# Altium PCB Interface.PcbDoc
Units mil, origin at the board's own origin, x right, y up, seen from the top; angles counter-clockwise.
Board outline 3937.01 x 6100 mil, 2 copper layers (Top Layer, Bottom Layer); 108 components, 96 nets, 344 pads, 0 vias.
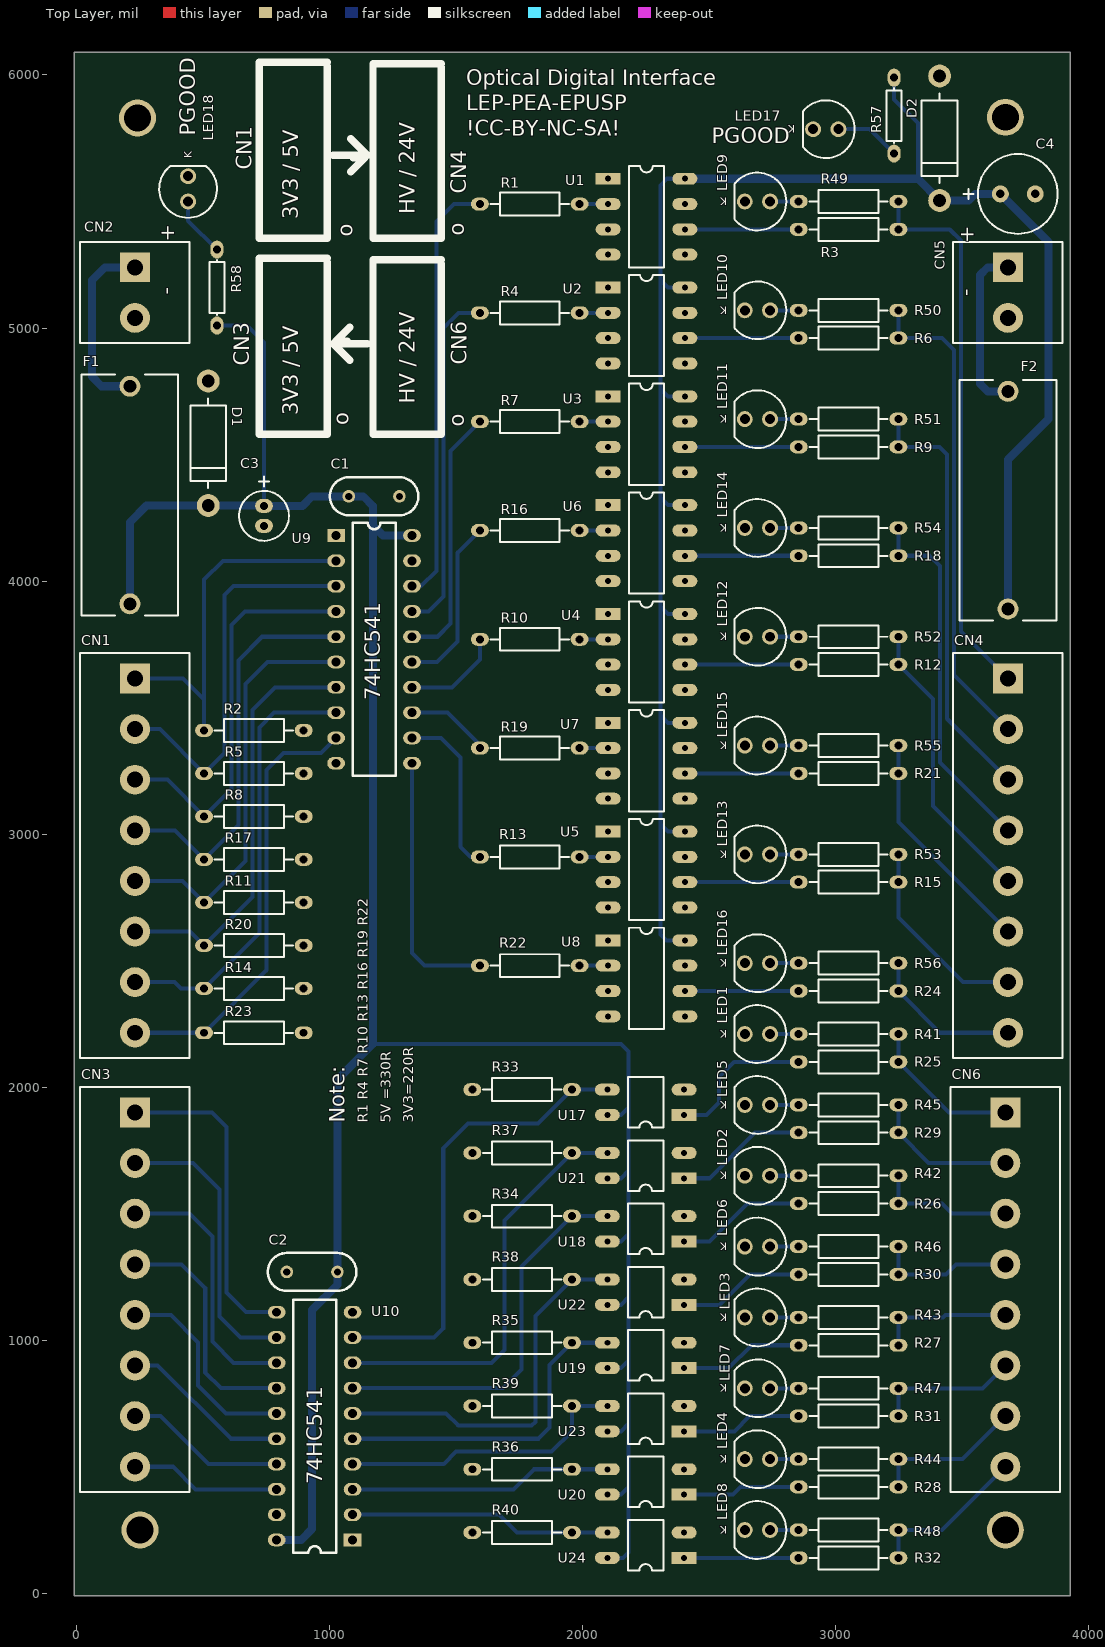
[diagram p0: Top Layer view]
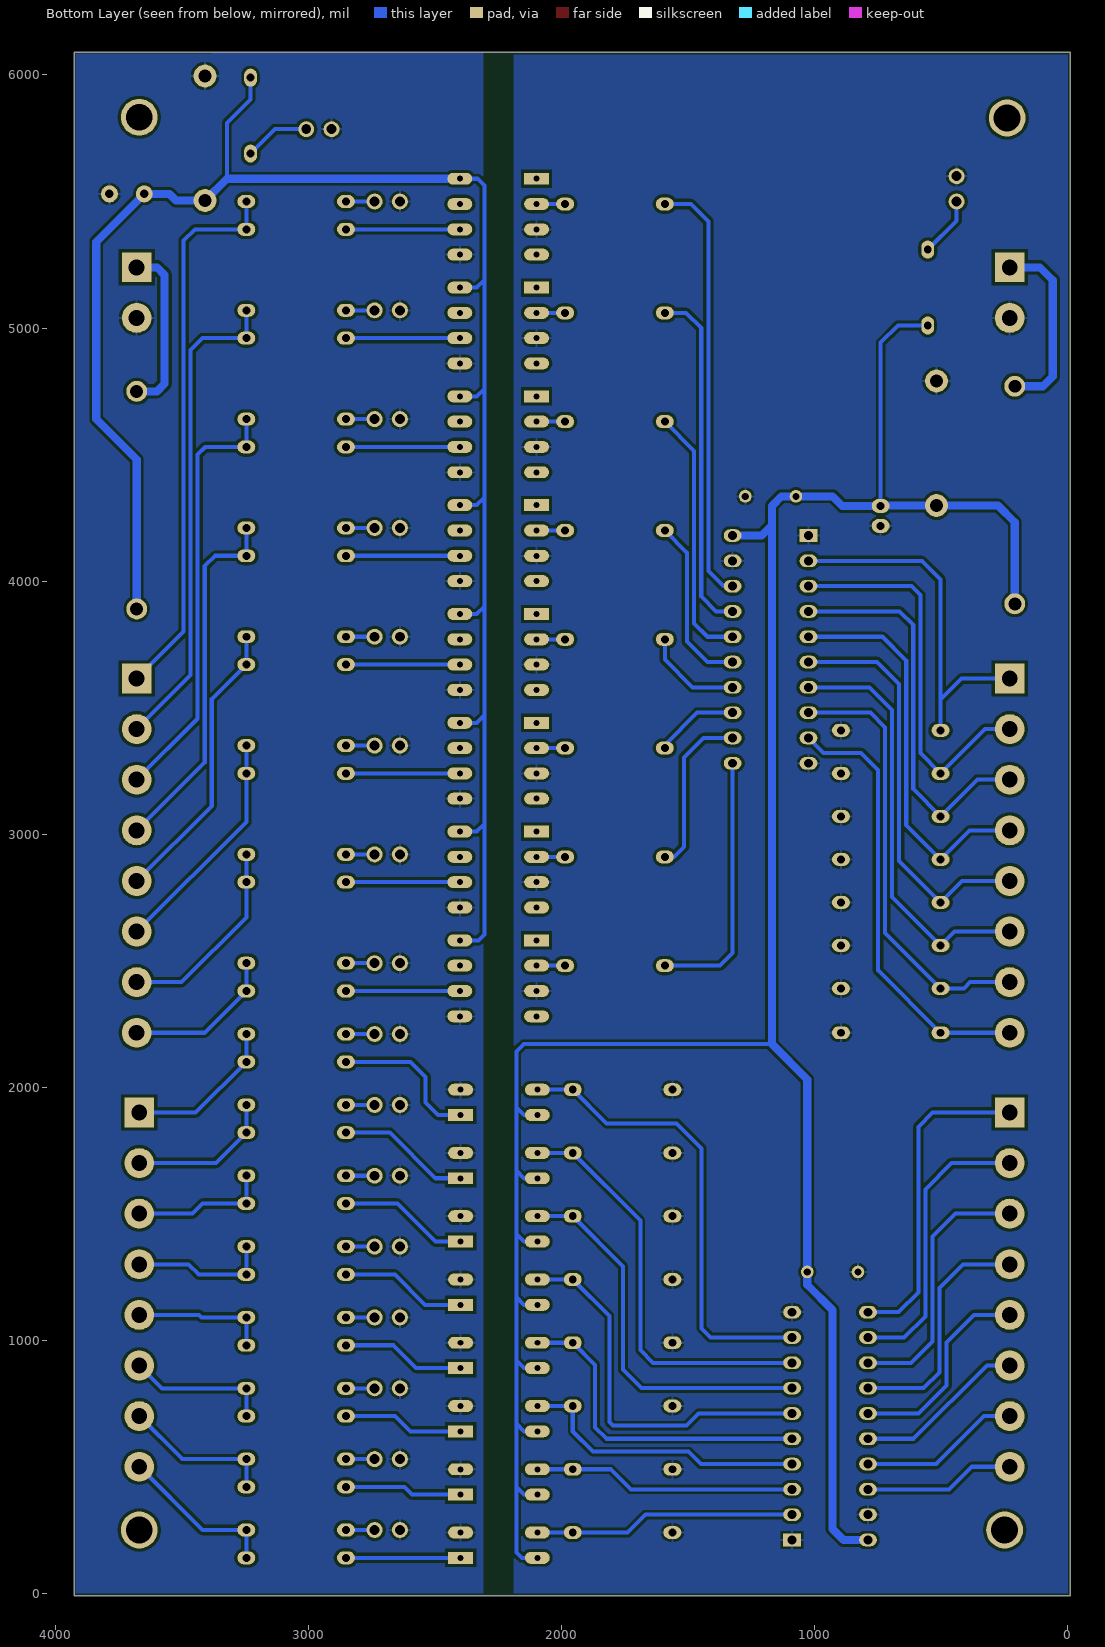
[diagram p1: Bottom Layer view, seen from below]

## Layer stack, top to bottom
Top Solder: solder mask 0.4, Solder Resist, Dk 3.5
Top Layer: signal copper 1.4
Dielectric 1: dielectric 12.6, FR-4, Dk 4.8
Bottom Layer: signal copper 1.4
Bottom Solder: solder mask 0.4, Solder Resist, Dk 3.5

## Board outline
-10,-10 3927.01,-10 3927.01,6090 -10,6090

## Design rules (kind name [scope] priority, off if disabled: settings)
Clearance [All] p1: gap=11.81
PolygonConnect [All] p1: connectstyle=Relief reliefconductorwidth=10 reliefentries=4 polygonreliefangle="90 Angle" airgapwidth=10
RoutingVias [All] p1: holewidth=28 width=50 viastyle="Through Hole" minholewidth=28 minwidth=50 maxholewidth=28 maxwidth=50
SolderMaskExpansion [All] p1: expansion=4
Width [All] p1: maxlimit=40 minlimit=10 preferedwidth=16 toplayer_maxwidth=10 toplayer_prefwidth=10 bottomlayer_minwidth=16 minimp=50.000000 maximp=50.000000 favimp=50.000000
30 further rules are at their usual default settings.

## Classes and differential pairs
component class U_Power: C1 C2 C3 C4 CN2 CN3 CN4 CN5 CN6 D1 D2 F1 F2 LED17 LED18 R57 R58
component class U_Interface_DigitalToCLP: LED9 LED10 LED11 LED12 LED13 LED14 LED15 LED16 R1 R2 R3 R4 R5 R6 R7 R8 R9 R10 R11 R12 R13 R14 R15 R16 R17 R18 R19 R20 R21 R22 R23 R24 R49 R50 R51 R52 R53 R54 R55 R56 U1 U2 U3 U4 U5 U6 U7 U8 U9
component class U_Interface_CLPToDigital: LED1 LED2 LED3 LED4 LED5 LED6 LED7 LED8 R25 R26 R27 R28 R29 R30 R31 R32 R33 R34 R35 R36 R37 R38 R39 R40 R41 R42 R43 R44 R45 R46 R47 R48 U10 U17 U18 U19 U20 U21 U22 U23 U24

## Components (designator, comment, footprint, x,y, rotation, side; value= is the part's Value field where it differs from the comment)
C1 "100nF" DiskCapacitor 1275,4335 r180 top
C2 "100nF" DiskCapacitor 830,1270 r0 top
C3 "100uF 16V" "ECA 5x11" 740,4297 r270 top
C4 "100uF 50V" "ECA 8x11.5" 3650,5530 r0 top
CN1 "EHK2V-08P" EHK2V-08P 230,3615 r0 top
CN2 "EHK2V-02P" EHK2V-02P 230,5240 r0 top
CN3 "EHK2V-08P" EHK2V-08P 230,1900 r0 top
CN4 "EHK2V-08P" EHK2V-08P 3680,3615 r0 top
CN5 "EHK2V-02P" EHK2V-02P 3680,5240 r0 top
CN6 "EHK2V-08P" EHK2V-08P 3670,1900 r0 top
D1 "1N5339BRLG" DO-15 519.6,4544.6 r270 top
D2 "1N5364BRLG" DO-15 3410,5750 r270 top
F1 "4527" 4527 210,4770 r270 top
F2 "4527" 4527 3680,3890 r90 top
LED1 "151053YS04500" "Type 5mm" 2690,2210 r180 top
LED2 "151053YS04500" "Type 5mm" 2690,1650 r180 top
LED3 "151053YS04500" "Type 5mm" 2690,1090 r180 top
LED4 "151053YS04500" "Type 5mm" 2690,530 r180 top
LED5 "151053YS04500" "Type 5mm" 2690,1930 r180 top
LED6 "151053YS04500" "Type 5mm" 2690,1370 r180 top
LED7 "151053YS04500" "Type 5mm" 2690,810 r180 top
LED8 "151053YS04500" "Type 5mm" 2690,250 r180 top
LED9 "151053YS04500" "Type 5mm" 2690,5500 r180 top
LED10 "151053YS04500" "Type 5mm" 2690,5070 r180 top
LED11 "151053YS04500" "Type 5mm" 2690,4640 r180 top
LED12 "151053YS04500" "Type 5mm" 2690,3780 r180 top
LED13 "151053YS04500" "Type 5mm" 2690,2920 r180 top
LED14 "151053YS04500" "Type 5mm" 2690,4210 r180 top
LED15 "151053YS04500" "Type 5mm" 2690,3350 r180 top
LED16 "151053YS04500" "Type 5mm" 2690,2490 r180 top
LED17 "151053YS04500" "Type 5mm" 2960,5785.74 r180 top
LED18 "151053YS04500" "Type 5mm" 440,5550 r90 top
R1 "330R" CR25 1790,5490 r0 top
R2 "10K" CR25 700,3410 r180 top
R3 "10R" CR25 3050,5390 r0 top
R4 "330R" CR25 1790,5060 r0 top
R5 "10K" CR25 700,3240 r180 top
R6 "10R" CR25 3050,4960 r0 top
R7 "330R" CR25 1790,4630 r0 top
R8 "10K" CR25 700,3070 r180 top
R9 "10R" CR25 3050,4530 r0 top
R10 "330R" CR25 1790,3770 r0 top
R11 "10K" CR25 700,2730 r180 top
R12 "10R" CR25 3050,3670 r0 top
R13 "330R" CR25 1790,2910 r0 top
R14 "10K" CR25 700,2390 r180 top
R15 "10R" CR25 3050,2810 r0 top
R16 "330R" CR25 1790,4200 r0 top
R17 "10K" CR25 700,2900 r180 top
R18 "10R" CR25 3050,4100 r0 top
R19 "330R" CR25 1790,3340 r0 top
R20 "10K" CR25 700,2560 r180 top
R21 "10R" CR25 3050,3240 r0 top
R22 "330R" CR25 1790,2480 r0 top
R23 "10K" CR25 700,2215 r180 top
R24 "10R" CR25 3050,2380 r0 top
R25 "2K2" CR25 3050,2100 r0 top
R26 "2K2" CR25 3050,1540 r0 top
R27 "2K2" CR25 3050,980 r0 top
R28 "2K2" CR25 3050,420 r0 top
R29 "2K2" CR25 3050,1820 r0 top
R30 "2K2" CR25 3050,1260 r0 top
R31 "2K2" CR25 3050,700 r0 top
R32 "2K2" CR25 3050,140 r0 top
R33 "2K2" CR25 1760,1990 r0 top
R34 "2K2" CR25 1760,1490 r0 top
R35 "2K2" CR25 1760,990 r180 top
R36 "2K2" CR25 1760,490 r0 top
R37 "2K2" CR25 1760,1740 r0 top
R38 "2K2" CR25 1760,1240 r0 top
R39 "2K2" CR25 1760,740 r0 top
R40 "2K2" CR25 1760,240 r0 top
R41 "1" CR25 3050,2210 r0 top
R42 "Res1" CR25 3050,1650 r0 top
R43 "Res1" CR25 3050,1090 r0 top
R44 "Res1" CR25 3050,530 r0 top
R45 "Res1" CR25 3050,1930 r0 top
R46 "Res1" CR25 3050,1370 r0 top
R47 "Res1" CR25 3050,810 r0 top
R48 "Res1" CR25 3050,250 r0 top
R49 "Res1" CR25 3050,5500 r0 top
R50 "Res1" CR25 3050,5070 r0 top
R51 "Res1" CR25 3050,4640 r0 top
R52 "Res1" CR25 3050,3780 r0 top
R53 "Res1" CR25 3050,2920 r0 top
R54 "Res1" CR25 3050,4210 r0 top
R55 "Res1" CR25 3050,3350 r0 top
R56 "Res1" CR25 3050,2490 r0 top
R57 "Res1" AXIAL-0.3 3230,5839.6 r90 top
R58 "Res1" AXIAL-0.3 553.94,5160 r270 top
U1 "TLP251" DIP8 2100,5590 r0 top
U2 "TLP251" DIP8 2100,5160 r0 top
U3 "TLP251" DIP8 2100,4730 r0 top
U4 "TLP251" DIP8 2100,3870 r0 top
U5 "TLP251" DIP8 2100,3010 r0 top
U6 "TLP251" DIP8 2100,4300 r0 top
U7 "TLP251" DIP8 2100,3440 r0 top
U8 "TLP251" DIP8 2100,2580 r0 top
U9 "SN74HC541" PDIP20 1025,4180 r0 top
U10 "SN74HC541" PDIP20 1090,210.63 r180 top
U17 "TLP620" DIP4 2400,1890 r180 top
U18 "TLP620" DIP4 2400,1390 r180 top
U19 "TLP620" DIP4 2400,890 r180 top
U20 "TLP620" DIP4 2400,390 r180 top
U21 "TLP620" DIP4 2400,1640 r180 top
U22 "TLP620" DIP4 2400,1140 r180 top
U23 "TLP620" DIP4 2400,640 r180 top
U24 "TLP620" DIP4 2400,140 r180 top

## Footprints (in the part's own frame and the unit in brackets; to place one, negate y for a bottom-side part, rotate by r counter-clockwise, add the part's x,y. Pads: shape width x height; smd on the part's side, far side on the other; paste and mask are expansions set on the pad)
4527 [mm] "5mm PC FUSE HOLDER"
  round 2.1 hole 1.3: 1(0,0) 2(21.84,0)
  silkscreen extent -1.16,-4.85 23,4.85, body extent -1.26,-4.95 23.1,4.95, height 10
AXIAL-0.3 [mm] "Axial Device, Thru-Hole; 2 Leads; 0.3 in Pin Spacing"
  oval 1.8x1.3 hole 0.8: 1(-3.81,0) 2(3.81,0)
  silkscreen extent -2.77,-0.76 2.77,0.76
CR25 [mm] "Through Hole Carbon Film Resistor - 1/4W (0.25W)"
  oval 1.8x1.3 hole 0.8: 1(-5,0) 2(5,0)
  silkscreen extent -3.94,-1.15 3.94,1.15
DIP4 [mm]
  rect 2.5x1.2 hole 0.6: 1(0,0)
  oval 2.5x1.2 hole 0.6: 2(0,-2.54) 3(7.7,-2.54) 4(7.7,0)
  silkscreen extent 2.08,-3.81 5.61,1.27
DIP8 [mm]
  rect 2.5x1.2 hole 0.6: 1(0,0)
  oval 2.5x1.2 hole 0.6: 2(0,-2.54) 3(0,-5.08) 4(0,-7.62) 5(7.7,-7.62) 6(7.7,-5.08) 7(7.7,-2.54) 8(7.7,0)
  silkscreen extent 2.08,-8.89 5.62,1.27
DiskCapacitor [mil]
  round 50 hole 28: 1(0,0) 2(200,0)
  silkscreen extent -75,-75 275,75, body extent -60,-20 260,20, height 380
DO-15 [mm] "DO-15"
  round 2.3 hole 1.3: 1(6.25,0) 2(-6.25,0)
  silkscreen extent -4.5,-1.8 4.5,1.8, body extent -3.8,-1.8 3.8,1.8, height 3.6
"ECA 5x11" [mm]
  oval 1.4x1.8 hole 0.8: 1(0,0) 2(2,0)
  silkscreen extent -2.98,-2.5 3.5,2.5, body extent -1.51,-2.51 3.51,2.51, height 11
"ECA 8x11.5" [mm]
  round 1.7 hole 0.85: 1(0,0) 2(3.5,0)
  silkscreen extent -3.73,-4 5.75,4, body extent -2.26,-4.01 5.76,4.01, height 11.5
EHK2V-02P [mm] "PCB Terminal Blocks"
  rect 3x3 hole 1.6: 1(0,0)
  round 3 hole 1.6: 2(0,-5.08)
  silkscreen extent -5.5,-7.62 5.5,2.54, body extent -5.6,-7.72 5.6,2.64, height 18
EHK2V-08P [mm] "PCB Terminal Blocks"
  rect 3x3 hole 1.6: 1(0,0)
  round 3 hole 1.6: 2(0,-5.08) 3(0,-10.16) 4(0,-15.24) 5(0,-20.32) 6(0,-25.4) 7(0,-30.48) 8(0,-35.56)
  silkscreen extent -5.5,-38.1 5.5,2.54, body extent -5.6,-38.1 5.6,2.54, height 18
PDIP20 [mil]
  rect 70x50 hole 35: 1(0,0)
  oval 70x50 hole 35: 2(0,-100) 3(0,-200) 4(0,-300) 5(0,-400) 6(0,-500) 7(0,-600) 8(0,-700) 9(0,-800) 10(0,-900) 11(300,-900) 12(300,-800) 13(300,-700) 14(300,-600) 15(300,-500) 16(300,-400) 17(300,-300) 18(300,-200) 19(300,-100) 20(300,0)
  silkscreen extent 65,-950 235,50, body extent -10,-950 310,50, height 100
"Type 5mm" [mm] "THT, LED-5mm, 2pin- Body 5.8mm"
  round 1.6 hole 1: 1(1.27,0) 2(-1.27,0)
  silkscreen extent -2.9,-2.9 2.29,2.9, body extent -2.9,-2.9 2.5,2.9, height 11.7

## Part data
C1 C2: library part Capacitor, "Capacitor"
C3: library part ECA1CM101
C4: library part ECA1HM101
CN1 CN2 CN3 CN4 CN5 CN6: "PCB Terminal Blocks"
D1: library part "Diode Zener", "5V6 @ 5W"
D2: library part "Diode Zener", "33V @ 5W"
F1 F2: "5mm PC FUSE HOLDER"
LED1 LED2 LED3 LED4 LED5 LED6 LED7 LED8 LED9 LED10 LED11 LED12 LED13 LED14 LED15 LED16 LED17 LED18: library part CMP-1477-00001-1, "THT LED round mono-color waterclear, WL-TMRW, Yellow"
R1 R2 R3 R4 R5 R6 R7 R8 R9 R10 R11 R12 R13 R14 R15 R16 R17 R18 R19 R20 R21 R22 R23 R24 R25 R26 R27 R28 R29 R30 R31 R32 R33 R34 R35 R36 R37 R38 R39 R40: library part Resistor, "Resistor"
R41: library part Res1, "Resistor"
R42 R43 R44 R45 R46 R47 R48 R49 R50 R51 R52 R53 R54 R55 R56 R57 R58: "Resistor"
U1 U2 U3 U4 U5 U6 U7 U8: "Photocoupler"
U9 U10: "Octal Buffers and Line Drivers With 3-State Outputs"
U17 U18 U19 U20 U21 U22 U23 U24: "TOSHIBA Photocoupler"

## Free pads (board coordinates)
  round 145.67 hole 106.3 unplated: FF1(240,5830) FF2(3670,5832.99) FF3(250,250) FF4(3670,250)

## Nets (pads, with @x,y where several pads share a name; then routed paths per layer and width w, separated by ;. In a path a pad name is that pad's centre, name@x,y a point inside that pad or via, vN(x,y) a via of type N, cw(c..) or ccw(c..) an arc to the next point about the centre after c; other vN are vias at no path point)
CLP_GND: C4.2 CN5.2 D2.2 LED1.1 LED2.1 LED3.1 LED4.1 LED5.1 LED6.1 LED7.1 LED8.1 LED9.1 LED10.1 LED11.1 LED12.1 LED13.1 LED14.1 LED15.1 LED16.1 LED17.1 U1.5 U2.5 U3.5 U4.5 U5.5 U6.5 U7.5 U8.5 U17.2 U18.2 U19.2 U20.2 U21.2 U22.2 U23.2 U24.2
GND: C1.1 C2.1 C3.2 CN2.2 D1.2 LED18.1 R2.1 R5.1 R8.1 R11.1 R14.1 R17.1 R20.1 R23.1 R33.1 R34.1 R35.2 R36.1 R37.1 R38.1 R39.1 R40.1 U1.3 U2.3 U3.3 U4.3 U5.3 U6.3 U7.3 U8.3 U9.1 U9.10 U9.19 U10.1 U10.10 U10.19
NetCN1_1: CN1.1 R2.2 U9.2 | length 1456.1
  Bottom Layer w16: CN1.1 419.73,3615 503.15,3531.58 ; R2.2 503.15,3531.58 ; U9.2 577.3,4080 503.15,4005.85 503.15,3531.58
NetCN1_2: CN1.2 R5.2 U9.3 | length 1539.6
  Bottom Layer w16: CN1.2 328.15,3415 R5.2 583.37,3320.22 583.37,3944.39 618.98,3980 U9.3
NetCN1_3: CN1.3 R8.2 U9.4 | length 1570.3
  Bottom Layer w16: CN1.3 358.15,3215 R8.2 611.18,3178.03 611.18,3826.3 664.88,3880 U9.4
NetCN1_4: CN1.4 R17.2 U9.5 | length 1588.5
  Bottom Layer w16: CN1.4 388.15,3015 R17.2 638.99,3035.84 638.99,3686.83 732.15,3780 U9.5
NetCN1_5: CN1.5 R11.2 U9.6 | length 1633.1
  Bottom Layer w16: CN1.5 418.15,2815 R11.2 666.8,2893.65 666.8,3592.54 754.26,3680 U9.6
NetCN1_6: CN1.6 R20.2 U9.7 | length 1673.6
  Bottom Layer w16: CN1.6 448.15,2615 R20.2 694.61,2751.46 694.61,3491.12 783.49,3580 U9.7
NetCN1_7: CN1.7 R14.2 U9.8 | length 1733
  Bottom Layer w16: CN1.7 386.22,2415 411.22,2390 R14.2 722.42,2609.27 722.42,3422.03 780.39,3480 U9.8
NetCN1_8: CN1.8 R23.2 U9.9 | length 1741.2
  Bottom Layer w16: CN1.8 R23.2 750.23,2462.08 750.23,3253.52 816.93,3320.22 965.22,3320.22 U9.9
NetCN2_1: CN2.1 F1.1 | length 737.6
  Bottom Layer w32: F1.1 98.22,4770 60,4808.22 60,5188.8 111.2,5240 CN2.1
NetCN3_1: CN3.1 U10.11 | length 1270.2
  Bottom Layer w16: CN3.1 534.28,1900 591.24,1843.04 591.24,1188.76 669.37,1110.63 U10.11
NetCN3_2: CN3.2 U10.12 | length 1139.4
  Bottom Layer w16: CN3.2 459.67,1700 563.43,1596.23 563.43,1094.52 647.32,1010.63 U10.12
NetCN3_3: CN3.3 U10.13 | length 1047.1
  Bottom Layer w16: CN3.3 445,1500 535.62,1409.38 535.62,994.62 619.61,910.63 U10.13
NetCN3_4: CN3.4 U10.14 | length 958
  Bottom Layer w16: CN3.4 414.1,1300 507.81,1206.29 507.81,872.82 570,810.63 U10.14
NetCN3_5: CN3.5 U10.15 | length 821.5
  Bottom Layer w16: CN3.5 371.66,1100 480,991.66 480,820.63 590,710.63 U10.15
NetCN3_6: CN3.6 U10.16 | length 679.9
  Bottom Layer w16: CN3.6 320,900 609.37,610.63 U10.16
NetCN3_7: CN3.7 U10.17 | length 638.4
  Bottom Layer w16: CN3.7 331.02,700 520.39,510.63 U10.17
NetCN3_8: CN3.8 U10.18 | length 597
  Bottom Layer w16: CN3.8 380,500 469.37,410.63 U10.18
NetCN4_1: CN4.1 R3.2 R49.2 | length 2183.4
  Bottom Layer w16: R49.2 R3.2 3450,5390 3494.67,5345.33 3494.67,3800.33 CN4.1
NetCN4_2: CN4.2 R6.2 R50.2 | length 1935.8
  Bottom Layer w16: R50.2 R6.2 3420,4960 3466.86,4913.14 3466.86,3628.14 CN4.2
NetCN4_3: CN4.3 R9.2 R51.2 | length 1699.5
  Bottom Layer w16: R51.2 R9.2 3409.16,4530 3439.05,4500.11 3439.05,3455.95 CN4.3
NetCN4_4: CN4.4 R18.2 R54.2 | length 1446.6
  Bottom Layer w16: R54.2 R18.2 3370,4100 3411.24,4058.76 3411.24,3283.76 CN4.4
NetCN4_5: CN4.5 R12.2 R52.2 | length 1144.4
  Bottom Layer w16: R52.2 3246.85,3670 3383.43,3533.42 3383.43,3111.57 CN4.5
NetCN4_6: CN4.6 R21.2 R55.2 | length 914.4
  Bottom Layer w16: R55.2 R21.2 3246.85,3048.15 CN4.6
NetCN4_7: CN4.7 R15.2 R53.2 | length 788.5
  Bottom Layer w16: R53.2 R15.2 3246.85,2670.45 3502.3,2415 CN4.7
NetCN4_8: CN4.8 R24.2 R56.2 | length 611.5
  Bottom Layer w16: R56.2 R24.2 3411.85,2215 CN4.8
NetCN5_1: CN5.1 F2.2 | length 674.9
  Bottom Layer w32: F2.2 3600.16,4749.84 3570,4780 3570,5210 3600,5240 CN5.1
NetCN6_1: CN6.1 R25.2 R41.2 | length 616
  Bottom Layer w16: R41.2 R25.2 3446.85,1900 CN6.1
NetCN6_2: CN6.2 R29.2 R45.2 | length 582.9
  Bottom Layer w16: R45.2 R29.2 3366.85,1700 CN6.2
NetCN6_3: CN6.3 R26.2 R42.2 | length 549.7
  Bottom Layer w16: R42.2 R26.2 3419.19,1540 3459.19,1500 CN6.3
NetCN6_4: CN6.4 R30.2 R46.2 | length 549.7
  Bottom Layer w16: R46.2 R30.2 3434.82,1260 3474.82,1300 CN6.4
NetCN6_5: CN6.5 R27.2 R43.2 | length 537.3
  Bottom Layer w16: R27.2 R43.2 3423.32,1090 3433.32,1100 CN6.5
NetCN6_6: CN6.6 R31.2 R47.2 | length 570.4
  Bottom Layer w16: R31.2 R47.2 3580,810 CN6.6
NetCN6_7: CN6.7 R28.2 R44.2 | length 603.6
  Bottom Layer w16: R28.2 R44.2 3500,530 CN6.7
NetCN6_8: CN6.8 R32.2 R48.2 | length 636.7
  Bottom Layer w16: R32.2 R48.2 3420,250 CN6.8
NetLED1_2: LED1.2 R41.1 | length 113.2
  Bottom Layer w16: LED1.2 R41.1
NetLED2_2: LED2.2 R42.1 | length 113.1
  Bottom Layer w16: LED2.2 R42.1
NetLED3_2: LED3.2 R43.1 | length 113.1
  Bottom Layer w16: LED3.2 R43.1
NetLED4_2: LED4.2 R44.1 | length 113.2
  Bottom Layer w16: LED4.2 R44.1
NetLED5_2: LED5.2 R45.1 | length 113.2
  Bottom Layer w16: LED5.2 R45.1
NetLED6_2: LED6.2 R46.1 | length 113.1
  Bottom Layer w16: LED6.2 R46.1
NetLED7_2: LED7.2 R47.1 | length 113.1
  Bottom Layer w16: LED7.2 R47.1
NetLED8_2: LED8.2 R48.1 | length 113.2
  Bottom Layer w16: LED8.2 R48.1
NetLED9_2: LED9.2 R49.1 | length 113.1
  Bottom Layer w16: LED9.2 R49.1@2853.15,5500
NetLED10_2: LED10.2 R50.1 | length 113.2
  Bottom Layer w16: LED10.2 R50.1
NetLED11_2: LED11.2 R51.1 | length 113.2
  Bottom Layer w16: LED11.2 R51.1
NetLED12_2: LED12.2 R52.1 | length 113.2
  Bottom Layer w16: LED12.2 R52.1
NetLED13_2: LED13.2 R53.1 | length 113.2
  Bottom Layer w16: LED13.2 R53.1
NetLED14_2: LED14.2 R54.1 | length 113.2
  Bottom Layer w16: LED14.2 R54.1
NetLED15_2: LED15.2 R55.1 | length 113.2
  Bottom Layer w16: LED15.2 R55.1
NetLED16_2: LED16.2 R56.1 | length 113.2
  Bottom Layer w16: LED16.2 R56.1
NetLED17_2: LED17.2 R57.1 | length 259.8
  Bottom Layer w16: LED17.2 3133.86,5785.74 R57.1
NetLED18_2: LED18.2 R58.1 | length 237.2
  Bottom Layer w16: LED18.2 440,5423.94 R58.1
NetR1_1: R1.1 U9.18 | length 1702.6
  Bottom Layer w16: U9.18 1361,3980 1421,4040 1421,5421 1490,5490 R1.1
NetR1_2: R1.2 U1.2 | length 113.2
  Bottom Layer w16: R1.2 U1.2
NetR3_1: R3.1 U1.6 | length 450
  Bottom Layer w16: U1.6 R3.1
NetR4_1: R4.1 U9.17 | length 1378.4
  Bottom Layer w16: U9.17 1390,3880 1449,3939 1449,5000 1509,5060 R4.1
NetR4_2: R4.2 U2.2 | length 113.2
  Bottom Layer w16: R4.2 U2.2
NetR6_1: R6.1 U2.6 | length 450
  Bottom Layer w16: U2.6 R6.1@2853.15,4960
NetR7_1: R7.1 U9.16 | length 1019.7
  Bottom Layer w16: U9.16 1425,3780 1477.2,3832.2 1477.2,4514.05 R7.1
NetR7_2: R7.2 U3.2 | length 113.2
  Bottom Layer w16: R7.2 U3.2
NetR9_1: R9.1 U3.6 | length 450
  Bottom Layer w16: U3.6 R9.1
NetR10_1: R10.1 U9.14 | length 393.9
  Bottom Layer w16: U9.14 1483.52,3580 1593.15,3689.63 R10.1
NetR10_2: R10.2 U4.2 | length 113.2
  Bottom Layer w16: R10.2 U4.2
NetR12_1: R12.1 U4.6 | length 450
  Bottom Layer w16: U4.6 R12.1
NetR13_1: R13.1 U9.12 | length 669.6
  Bottom Layer w16: U9.12 1440,3380 1517,3303 1517,2950 1557,2910 R13.1
NetR13_2: R13.2 U5.2 | length 113.2
  Bottom Layer w16: R13.2 U5.2
NetR15_1: R15.1 U5.6 | length 450
  Bottom Layer w16: U5.6 R15.1
NetR16_1: R16.1 U9.15 | length 689.4
  Bottom Layer w16: U9.15 1424.54,3680 1505.01,3760.48 1505.01,4111.86 R16.1
NetR16_2: R16.2 U6.2 | length 113.2
  Bottom Layer w16: R16.2 U6.2
NetR18_1: R18.1 U6.6 | length 450
  Bottom Layer w16: U6.6 R18.1
NetR19_1: R19.1 U9.13 | length 333.1
  Bottom Layer w16: U9.13 1465,3480 1593.15,3351.85 R19.1
NetR19_2: R19.2 U7.2 | length 113.2
  Bottom Layer w16: R19.2 U7.2
NetR21_1: R21.1 U7.6 | length 450
  Bottom Layer w16: U7.6 R21.1
NetR22_1: R22.1 U9.11 | length 1038.9
  Bottom Layer w16: U9.11 1325,2530 1375,2480 R22.1
NetR22_2: R22.2 U8.2 | length 113.2
  Bottom Layer w16: R22.2 U8.2
NetR24_1: R24.1 U8.6 | length 450
  Bottom Layer w16: U8.6 R24.1
NetR25_1: R25.1 U17.1 | length 599.1
  Bottom Layer w16: U17.1 2489,1890 2539,1940 2539,2040.71 2598.29,2100 R25.1
NetR26_1: R26.1 U18.1 | length 515.3
  Bottom Layer w16: U18.1 2500,1390 2650,1540 R26.1
NetR27_1: R27.1 U19.1 | length 490.4
  Bottom Layer w16: U19.1 2575.72,890 2665.72,980 R27.1
NetR28_1: R28.1 U20.1 | length 465.6
  Bottom Layer w16: U20.1 2592.61,390 2622.61,420 R28.1
NetR29_1: R29.1 U21.1 | length 527.7
  Bottom Layer w16: U21.1 2500,1640 2680,1820 R29.1
NetR30_1: R30.1 U22.1 | length 502.9
  Bottom Layer w16: U22.1 2540,1140 2660,1260 R30.1
NetR31_1: R31.1 U23.1 | length 478
  Bottom Layer w16: U23.1 2598.57,640 2658.57,700 R31.1
NetR32_1: R32.1 U24.1 | length 454.5
  Bottom Layer w16: U24.1 R32.1 R32.1@2853.15,138.69
NetR33_2: R33.2 U10.9 U17.3 | length 1829.4
  Bottom Layer w16: U10.9 1412.15,1010.63 1448.29,1046.76 1448.29,1758.4 1546.06,1856.17 1823.02,1856.17 R33.2 U17.3
NetR34_2: R34.2 U10.7 U18.3 | length 1527
  Bottom Layer w16: U10.7 1685.01,810.63 1757.91,883.54 1757.91,1291.06 R34.2 U18.3
NetR35_1: R35.1 U10.5 U19.3 | length 1308.5
  Bottom Layer w16: U10.5 1824.14,610.63 1868.44,654.94 1868.44,901.59 R35.1 U19.3
NetR36_2: R36.2 U10.3 U20.3 | length 1039.7
  Bottom Layer w16: U10.3 1726.88,410.63 1806.25,490 R36.2 U20.3
NetR37_2: R37.2 U10.8 U21.3 | length 1650.4
  Bottom Layer w16: U10.8 1639.55,910.63 1690,961.08 1690,1473.15 R37.2 U21.3
NetR38_2: R38.2 U10.6 U22.3 | length 1511.1
  Bottom Layer w16: U10.6 1459.37,710.63 1507.72,662.28 1797.24,662.28 1812.19,677.23 1812.19,1095.34 R38.2 U22.3
NetR39_2: R39.2 U10.4 U23.3 | length 1160.6
  Bottom Layer w16: U10.4 1450.43,510.63 1499.4,559.6 1876.81,559.6 1956.85,639.64 R39.2 U23.3
NetR40_2: R40.2 U10.2 U24.3 | length 1036.1
  Bottom Layer w16: U10.2 1669.37,310.63 1740,240 R40.2 U24.3
VCC: C1.2 C2.2 C3.1 D1.1 F1.2 R58.2 U9.20 U10.20 U17.4 U18.4 U19.4 U20.4 U21.4 U22.4 U23.4 U24.4 | length 10433.2
  Bottom Layer w16: R58.2 671.94,5010 740,4941.94 C3.1 ; 1170,2170 2150.42,2170 2180,2140.42 2180,1920 ; U24.4 2158.18,140 2180,161.82 2180,920 ; U20.4 2150,390 2180,420 ; U23.4 2150,640 2180,670 ; U19.4 2150,890 2180,920 ; U22.4 2150,1140 2180,1170 ; U18.4 2150,1390 2180,1420 ; U21.4 2150,1640 2180,1670 ; U17.4 2150,1890 2180,1920 ; 2180,920 2180,1170 ; 2180,1170 2180,1420 ; 2180,1420 2180,1670 ; 2180,1670 2180,1920
  Bottom Layer w32: F1.2 210,4232.31 276.23,4298.53 D1.1 C3.1@738.47,4298.53 ; C3.1 892,4297 930,4335 C1.2 1132,4335 1170,4297 1170,4220 ; U10.20 887.37,210.63 930,253.26 930,1119.21 1030,1219.21 1030,2030 1170,2170 1170,4220 ; U9.20 1210,4180 1170,4220
VCC_CLP: C4.1 D2.1 F2.1 R57.2 U1.8 U2.8 U3.8 U4.8 U5.8 U6.8 U7.8 U8.8 | length 7346.6
  Bottom Layer w16: U8.8 2330,2580 2306.31,2603.69 2306.31,3040 ; U5.8 2336.31,3010 2306.31,3040 ; U7.8 2336.31,3440 2306.31,3470 ; U4.8 2336.31,3870 2306.31,3900 ; U6.8 2336.31,4300 2306.31,4330 ; U3.8 2336.31,4730 2306.31,4760 ; U2.8 2336.31,5160 2306.31,5190 ; U1.8 2332.83,5590 2306.31,5563.49 2306.31,5190 ; R57.2 3230,5903.94 3323.94,5810 3323.94,5590 ; 2306.31,3040 2306.31,3470 ; 2306.31,3470 2306.31,3900 ; 2306.31,3900 2306.31,4330 ; 2306.31,4330 2306.31,4760 ; 2306.31,4760 2306.31,5190
  Bottom Layer w32: U1.8 3323.94,5590 D2.1 3524.69,5503.94 3550.75,5530 C4.1 3840,5340 3840,4640 3680,4480 F2.1
pads on no net: U1.1 U1.4 U1.7 U2.1 U2.4 U2.7 U3.1 U3.4 U3.7 U4.1 U4.4 U4.7 U5.1 U5.4 U5.7 U6.1 U6.4 U6.7 U7.1 U7.4 U7.7 U8.1 U8.4 U8.7

## Polygon pours and split planes (outlines as drawn)
CLP_GND on Bottom Layer "CLP_GND" (solid, remove dead copper, pour order 2): 3920,0 2310,0 2310,130 2310,6090 3920,6082.99
GND on Bottom Layer "GND" (solid, remove dead copper, pour order 4): 0,0 2190,0 2190,6080 0,6080

## Silkscreen, mask and mechanical layers (free items; w line width, h text height)
Top Overlay:
  lines w29.53: 990.82,5260 990.82,4580 720.82,4580 720.82,5275 990.82,5275 ; 990.82,6035 990.82,5355 720.82,5355 720.82,6050 990.82,6050 ; 1013.32,5682.5 1148.32,5682.5 1083.32,5747.5 ; 1023.32,4947.5 1078.32,5002.5 ; 1063.32,4947.5 1068.32,4947.5 ; 1078.32,4872.5 1013.32,4937.5 1148.32,4937.5 ; 1083.32,5617.5 1138.32,5672.5 ; 1093.32,5672.5 1098.32,5672.5 ; 1440.82,5255 1440.82,4580 1170.82,4580 1170.82,5270 1440.82,5270 ; 1440.82,6030 1440.82,5355 1170.82,5355 1170.82,6045 1440.82,6045
  text "Optical Digital Interface" at 1540,5960 h60
  text "LEP-PEA-EPUSP" at 1540,5860 h60
  text "PGOOD" at 468.32,5760 h60 r90
  text "!CC-BY-NC-SA!" at 1540,5760 h60
  text "PGOOD" at 2510,5730 h60
  text "CN1" at 690.82,5625 h60 r90
  text "CN4" at 1540,5530 h60 r90
  text "HV / 24V" at 1335,5450 h60 r90
  text "3V3 / 5V" at 875.82,5430 h60 r90
  text "+       -" at 335,5410 h60 r270
  text "+       -" at 3495,5405 h60 r270
  text "o" at 1530.82,5365 h60 r90
  text "o" at 1090.82,5360 h60 r90
  text "CN6" at 1540.82,4855 h60 r90
  text "CN3" at 680.82,4850 h60 r90
  text "HV / 24V" at 1335,4700 h60 r90
  text "3V3 / 5V" at 875.82,4655 h60 r90
  text "o" at 1075.82,4615 h60 r90
  text "o" at 1530.82,4610 h60 r90
  text "74HC541" at 1200,3530 h60 r90
  text "Note:" at 1060,1860 h60 r90
  text "R1 R4 R7 R10 R13 R16 R19 R22" at 1150,1860 h40 r90
  text "5V =330R" at 1240,1860 h40 r90
  text "3V3=220R" at 1330,1860 h40 r90
  text "74HC541" at 970,430 h60 r90
Mechanical 15:
  lines w9.84: -15,6080 -15,-10 3925,-10 3925,6085 -15,6085

## Text inside footprints (layer, text, board x,y; h text height)
LED1: Top Overlay "K" at 2570,2225 h30 r180; Mechanical 15 "K" at 2570,2225 h30 r180
LED2: Top Overlay "K" at 2570,1665 h30 r180; Mechanical 15 "K" at 2570,1665 h30 r180
LED3: Top Overlay "K" at 2570,1105 h30 r180; Mechanical 15 "K" at 2570,1105 h30 r180
LED4: Top Overlay "K" at 2570,545 h30 r180; Mechanical 15 "K" at 2570,545 h30 r180
LED5: Top Overlay "K" at 2570,1945 h30 r180; Mechanical 15 "K" at 2570,1945 h30 r180
LED6: Top Overlay "K" at 2570,1385 h30 r180; Mechanical 15 "K" at 2570,1385 h30 r180
LED7: Top Overlay "K" at 2570,825 h30 r180; Mechanical 15 "K" at 2570,825 h30 r180
LED8: Top Overlay "K" at 2570,265 h30 r180; Mechanical 15 "K" at 2570,265 h30 r180
LED9: Top Overlay "K" at 2570,5515 h30 r180; Mechanical 15 "K" at 2570,5515 h30 r180
LED10: Top Overlay "K" at 2570,5085 h30 r180; Mechanical 15 "K" at 2570,5085 h30 r180
LED11: Top Overlay "K" at 2570,4655 h30 r180; Mechanical 15 "K" at 2570,4655 h30 r180
LED12: Top Overlay "K" at 2570,3795 h30 r180; Mechanical 15 "K" at 2570,3795 h30 r180
LED13: Top Overlay "K" at 2570,2935 h30 r180; Mechanical 15 "K" at 2570,2935 h30 r180
LED14: Top Overlay "K" at 2570,4225 h30 r180; Mechanical 15 "K" at 2570,4225 h30 r180
LED15: Top Overlay "K" at 2570,3365 h30 r180; Mechanical 15 "K" at 2570,3365 h30 r180
LED16: Top Overlay "K" at 2570,2505 h30 r180; Mechanical 15 "K" at 2570,2505 h30 r180
LED17: Top Overlay "K" at 2840,5800.74 h30 r180; Mechanical 15 "K" at 2840,5800.74 h30 r180
LED18: Top Overlay "K" at 455,5670 h30 r90; Mechanical 15 "K" at 455,5670 h30 r90